# EAGLE board Matrix LED Circuit (EAGLE 9.7.0)

Size 156.45 x 100.38 mm. Coordinates in mm from the lower left corner, seen from the top.
Outline: 0,0 156.45,0 156.45,100.38 0,100.38 0,0
Copper layers (1*16): Top 0.035mm / dielectric 1.5mm / Bottom 0.035mm
Design rules "default": minimum track width 6mil, minimum drill 0.35mm, track to track 6mil, track to pad 6mil, pad to pad 6mil, via to via 6mil, smd to smd 6mil, copper to edge 40mil, drill to drill 6mil, minimum pad ring 10mil, minimum via ring 8mil, stop-mask expansion 4mil, vias tented up to drill 0mil, thermal gap 10mil

## Footprints (pad centres in the part's own frame; a part is rotated, then mirrored left to right if it is on the bottom)
LEDRD254W60D565H860B = drill 0.981 pad 1.581: 1 -1.27,0; 2 1.27,0
RESAD1016W63L850D250B = drill 0.83 pad 1.43: 1 -5.08,0; 2 5.08,0
ARDUINO-UNO-R3-SHIELD = drill 1.016 pad 1.88: 3.3V 24.13,-2.54; 5V 24.13,0; A0 24.13,12.7; A1 24.13,15.24; A2 24.13,17.78; A3 24.13,20.32; A4 24.13,22.86; A5 24.13,25.4; AREF -24.13,-13.97; D2 -24.13,20.32; D3 -24.13,17.78; D4 -24.13,15.24; D5 -24.13,12.7; D6 -24.13,10.16; D7 -24.13,7.62; D8 -24.13,3.81; D9 -24.13,1.27; D10 -24.13,-1.27; D11 -24.13,-3.81; D12 -24.13,-6.35; D13 -24.13,-8.89; GND@0 24.13,2.54; GND@1 24.13,5.08; GND@2 -24.13,-11.43; IOREF 24.13,-7.62; NC 24.13,-10.16; RES 24.13,-5.08; RX -24.13,25.4; SCL -24.13,-19.05; SDA -24.13,-16.51; TX -24.13,22.86; VIN 24.13,7.62

## Placement (x,y rotation side)
D1  RED  [LEDRD254W60D565H860B]  128.7,42.13 180 top
D2  RED  [LEDRD254W60D565H860B]  136.24,42.02 180 top
D4  RED  [LEDRD254W60D565H860B]  142.34,92.42 180 top
D5  RED  [LEDRD254W60D565H860B]  142.19,79.87 180 top
D6  RED  [LEDRD254W60D565H860B]  142.82,67.96 180 top
D7  RED  [LEDRD254W60D565H860B]  143.08,54.23 180 top
D8  RED  [LEDRD254W60D565H860B]  142.93,42 180 top
D9  RED  [LEDRD254W60D565H860B]  150.24,92.28 180 top
D10  RED  [LEDRD254W60D565H860B]  150.36,79.75 180 top
D11  RED  [LEDRD254W60D565H860B]  105.79,92.47 180 top
D12  RED  [LEDRD254W60D565H860B]  112.64,92.47 180 top
D13  RED  [LEDRD254W60D565H860B]  120,92.3 180 top
D14  RED  [LEDRD254W60D565H860B]  127.54,92.3 180 top
D15  RED  [LEDRD254W60D565H860B]  135.07,92.3 180 top
D16  RED  [LEDRD254W60D565H860B]  106.31,79.63 180 top
D17  RED  [LEDRD254W60D565H860B]  112.81,79.73 180 top
D18  RED  [LEDRD254W60D565H860B]  120,79.63 180 top
D19  RED  [LEDRD254W60D565H860B]  127.71,79.63 180 top
D20  RED  [LEDRD254W60D565H860B]  135.41,79.97 180 top
D21  RED  [LEDRD254W60D565H860B]  106.65,67.98 180 top
D22  RED  [LEDRD254W60D565H860B]  113.15,67.81 180 top
D23  RED  [LEDRD254W60D565H860B]  120.35,68.16 180 top
D24  RED  [LEDRD254W60D565H860B]  127.59,68.01 180 top
D25  RED  [LEDRD254W60D565H860B]  135.93,68.33 180 top
D26  RED  [LEDRD254W60D565H860B]  106.82,54.63 180 top
D27  RED  [LEDRD254W60D565H860B]  113.76,54.67 180 top
D28  RED  [LEDRD254W60D565H860B]  121.03,54.63 180 top
D29  RED  [LEDRD254W60D565H860B]  128.56,54.63 180 top
D30  RED  [LEDRD254W60D565H860B]  136.44,54.46 180 top
D31  RED  [LEDRD254W60D565H860B]  107.01,42.45 180 top
D32  RED  [LEDRD254W60D565H860B]  113.73,42.35 180 top
D33  RED  [LEDRD254W60D565H860B]  121.72,42.13 180 top
D34  RED  [LEDRD254W60D565H860B]  150.39,68.03 180 top
D35  RED  [LEDRD254W60D565H860B]  150.24,54.08 180 top
D36  RED  [LEDRD254W60D565H860B]  150.39,41.81 180 top
R2  50  [RESAD1016W63L850D250B]  105.76,31.52 90 top
R3  50  [RESAD1016W63L850D250B]  112.38,31.81 90 top
R4  50  [RESAD1016W63L850D250B]  120.31,31.67 90 top
R5  50  [RESAD1016W63L850D250B]  127.36,31.67 90 top
R6  50  [RESAD1016W63L850D250B]  134.85,31.52 90 top
R7  50  [RESAD1016W63L850D250B]  149.25,31.16 90 top
R8  50  [RESAD1016W63L850D250B]  141.69,30.61 90 top
U1  ARDUINO-UNO-R3-SHIELD  [ARDUINO-UNO-R3-SHIELD]  29.84,34.52 180 top

## Library data of the parts
D1 D2 D4-D36 = Tinkercad; CATEGORY: Opto-Electronic; SUB-CATEGORY: LED; VALUE: LED_RED
R2-R8 U1 = Tinkercad

## Nets
D4_C: D4.2 D5.2 D6.2 D7.2 D8.2 R8.2
D12_C: D12.2 D17.2 D22.2 D27.2 D32.2 R3.2
D13_C: D13.2 D18.2 D23.2 D28.2 D33.2 R4.2
D14_C: D1.2 D14.2 D19.2 D24.2 D29.2 R5.2
D15_C: D2.2 D15.2 D20.2 D25.2 D30.2 R6.2
D31_C: D11.2 D16.2 D21.2 D26.2 D31.2 R2.2
D34_C: D9.2 D10.2 D34.2 D35.2 D36.2 R7.2
U1_D2: R5.1 U1.D2
U1_D3: R4.1 U1.D3
U1_D4: R3.1 U1.D4
U1_D5: R2.1 U1.D5
U1_D6: D1.1 D2.1 D8.1 D31.1 D32.1 D33.1 D36.1 U1.D6
U1_D7: D7.1 D26.1 D27.1 D28.1 D29.1 D30.1 D35.1 U1.D7
U1_D8: D6.1 D21.1 D22.1 D23.1 D24.1 D25.1 D34.1 U1.D8
U1_D9: D5.1 D10.1 D16.1 D17.1 D18.1 D19.1 D20.1 U1.D9
U1_D10: D4.1 D9.1 D11.1 D12.1 D13.1 D14.1 D15.1 U1.D10
U1_D11: R7.1 U1.D11
U1_RX: R8.1 U1.RX
U1_TX: R6.1 U1.TX

## Tracks (layer width: path | path; a pad name or v marks a point on that pad's centre or on a via)
D4_C  (5 unrouted)
D12_C  (5 unrouted)
D13_C  (5 unrouted)
D14_C  (5 unrouted)
D15_C  (5 unrouted)
D31_C  (5 unrouted)
D34_C  (5 unrouted)
U1_D2  (1 unrouted)
U1_D3  (1 unrouted)
U1_D4  (1 unrouted)
U1_D5  (1 unrouted)
U1_D6  (7 unrouted)
U1_D7  (7 unrouted)
U1_D8  (7 unrouted)
U1_D9  (7 unrouted)
U1_D10  (7 unrouted)
U1_D11  (1 unrouted)
U1_RX  (1 unrouted)
U1_TX  (1 unrouted)